# Altium PCB PCB.PcbDoc
Units mil, origin at the board's own origin, x right, y up, seen from the top; angles counter-clockwise.
Board outline 2420.03 x 3310.03 mil, 2 copper layers (Top Layer, Bottom Layer); 31 components, 31 nets, 145 pads, 2 vias.
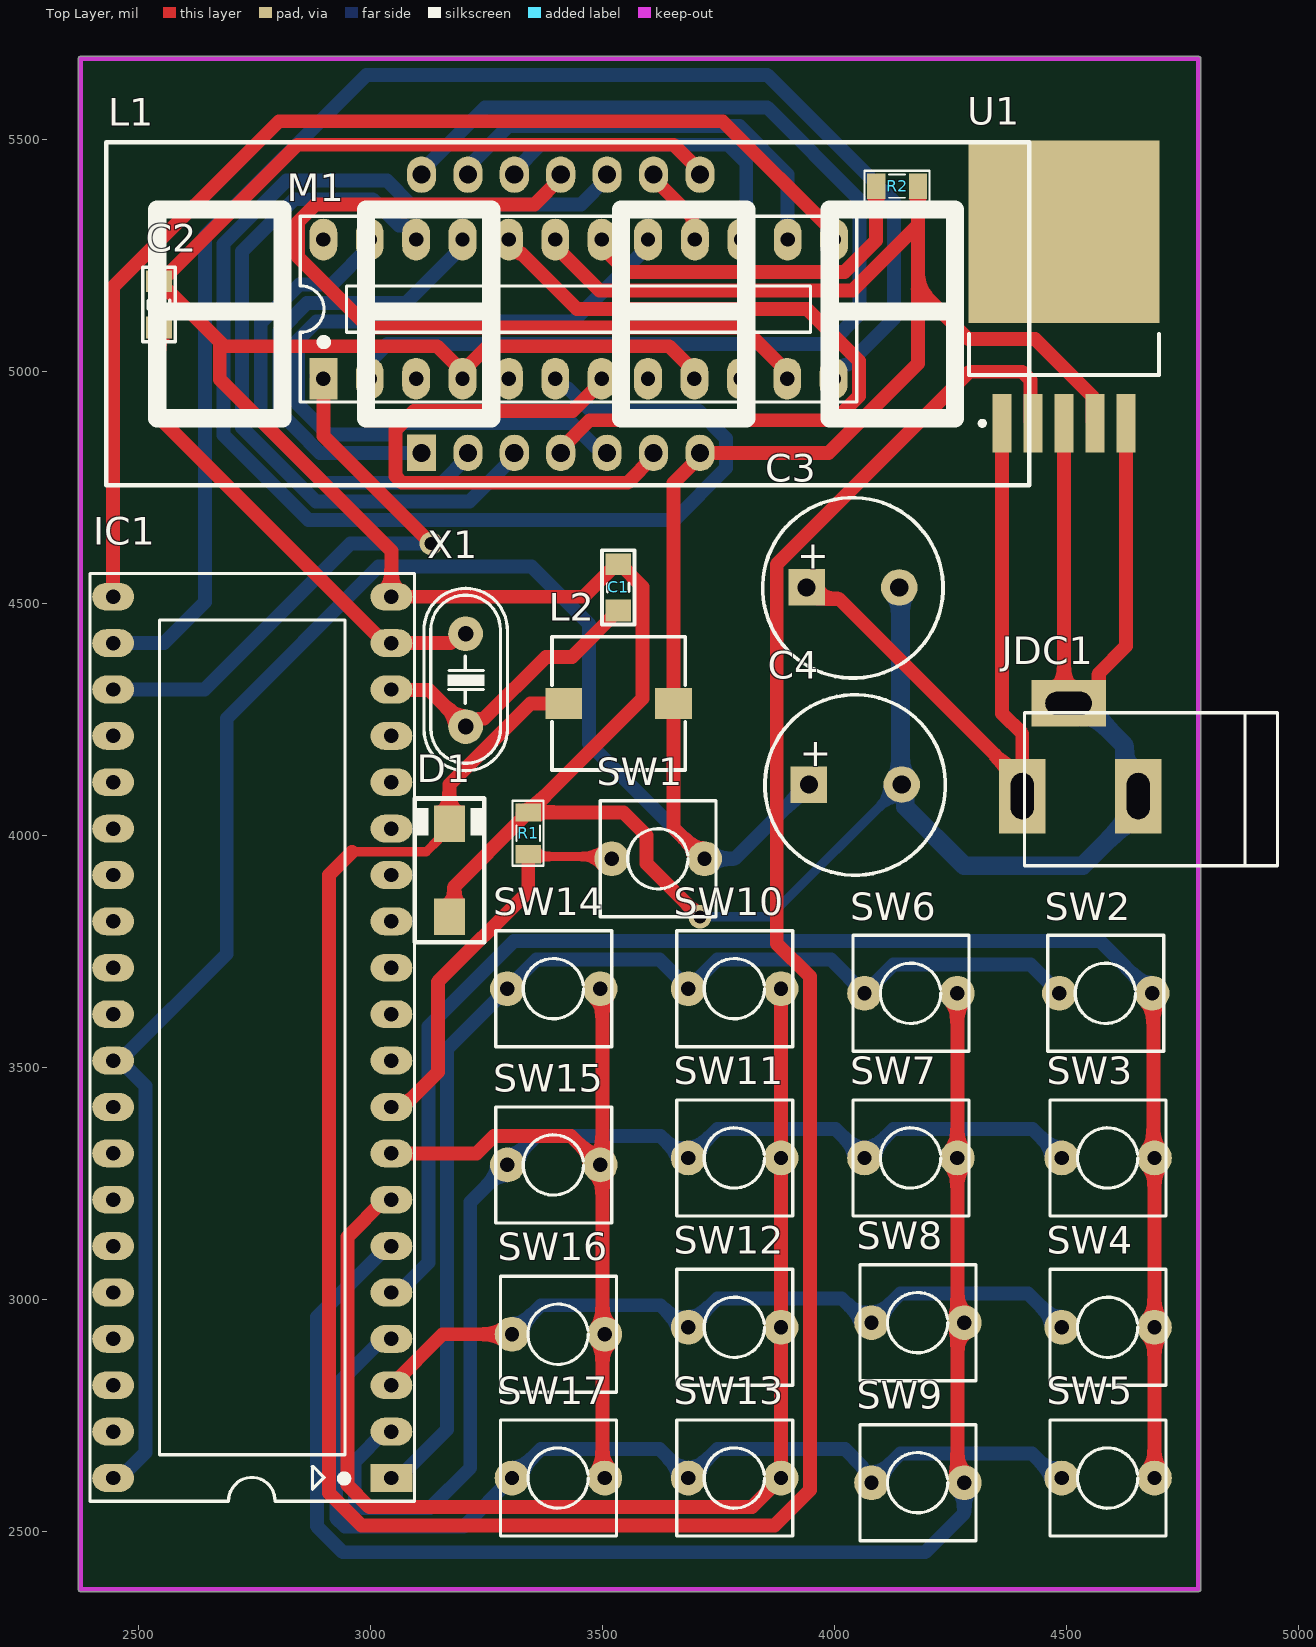
[diagram p0: Top Layer view]
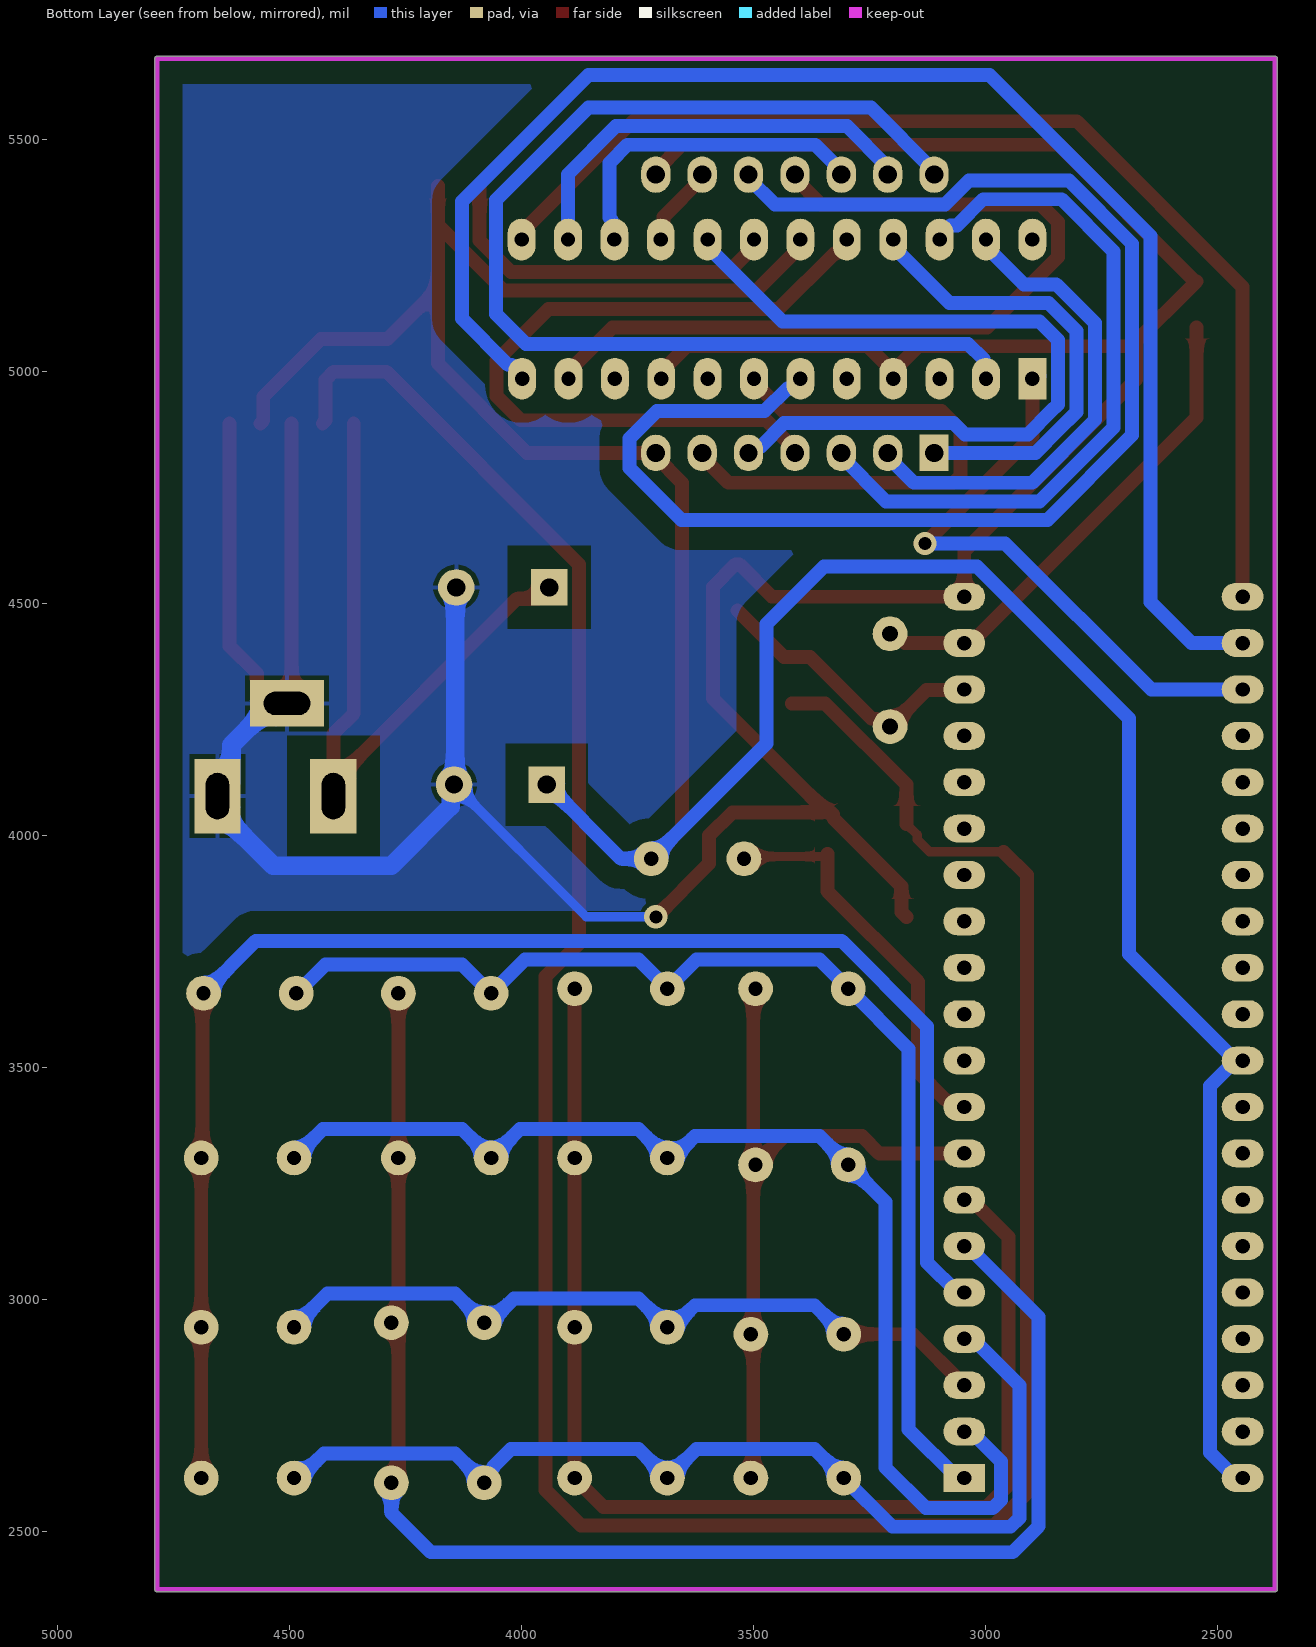
[diagram p1: Bottom Layer view, seen from below]

## Layer stack, top to bottom
Top Solder: solder mask 0.4, Solder Resist, Dk 3.5
Top Layer: signal copper 1.4
Dielectric 1: dielectric 12.6, FR-4, Dk 4.8
Bottom Layer: signal copper 1.4
Bottom Solder: solder mask 0.4, Solder Resist, Dk 3.5

## Board outline
2375,2369.99 cw(c2375,2375) 2369.99,2375 2369.99,5675 cw(c2375,5675) 2375,5680.02 4785,5680.02 cw(c4785,5675) 4790.02,5675 4790.02,2375 cw(c4785,2375) 4785,2369.99

## Design rules (kind name [scope] priority, off if disabled: settings)
Clearance [All] p1: gap=50 ignorepadtopadclearanceinfootprint=FALSE
PolygonConnect [All] p1: connectstyle=Relief reliefconductorwidth=10 reliefentries=4 polygonreliefangle="90 Angle" airgapwidth=10
RoutingVias [All] p1: holewidth=28 width=50 viastyle="Through Hole" minholewidth=28 minwidth=50 maxholewidth=28 maxwidth=50
SolderMaskExpansion [All] p1: expansion=4 istentingtop=FALSE
Width [All] p1: maxlimit=40 minlimit=20 preferedwidth=30
30 further rules are at their usual default settings.

## Classes and differential pairs
component class 3: C3 C4 D1 JDC1 L2 U1
component class 2: L1 M1 R2
component class 1: C1 C2 IC1 R1 SW1 X1
component class 0: SW2 SW3 SW4 SW5 SW6 SW7 SW8 SW9 SW10 SW11 SW12 SW13 SW14 SW15 SW16 SW17

## Components (designator, comment, footprint, x,y, rotation, side; value= is the part's Value field where it differs from the comment)
C1 "22pF" CAP_0805 3535,4535 r270 top value=33p
C2 "22pF" CAP_0805 2545,5145 r270 top value=33p
C3 "470uF" C10mm 4040,4535 r0 top
C4 "220uF" C10mm 4045,4110 r0 top
D1 "1N5822" SMA 3170,3925 r90 top value="Diode c?m 1N5408"
IC1 "AT89C52" DIP40/W0.6 3045,2615 r90 top
JDC1 "Jac DC" DC-IN 4530,4185 r180 top
L1 "Led 7 Seg 4 digit - Anode" LED7SEG-4-0.56-RG 3430,5120 r0 top
L2 "150mH" L-SMD-M-7.3x4.5 3535,4285 r90 top value="150 mH"
M1 "MAX7219ENG" DIP24/W0.3 2898.25,4985 r0 top
R1 "100k" RES-SMD-0805 3340,4005 r270 top
R2 "10k" RES-SMD-0805 4135,5400 r0 top
SW1 "SW" SW2 3520,3950 r0 top value="SW chip 2 pin"
SW2 "SW" SW2 4485,3660 r0 top value="SW chip 2 pin"
SW3 "SW" SW2 4490,3305 r0 top value="SW chip 2 pin"
SW4 "SW" SW2 4490,2940 r0 top value="SW chip 2 pin"
SW5 "SW" SW2 4490,2615 r0 top value="SW chip 2 pin"
SW6 "SW" SW2 4065,3660 r0 top value="SW chip 2 pin"
SW7 "SW" SW2 4065,3305 r0 top value="SW chip 2 pin"
SW8 "SW" SW2 4080,2950 r0 top value="SW chip 2 pin"
SW9 "SW" SW2 4080,2605 r0 top value="SW chip 2 pin"
SW10 "SW" SW2 3685,3670 r0 top value="SW chip 2 pin"
SW11 "SW" SW2 3685,3305 r0 top value="SW chip 2 pin"
SW12 "SW" SW2 3685,2940 r0 top value="SW chip 2 pin"
SW13 "SW" SW2 3685,2615 r0 top value="SW chip 2 pin"
SW14 "SW" SW2 3295,3670 r0 top value="SW chip 2 pin"
SW15 "SW" SW2 3295,3290 r0 top value="SW chip 2 pin"
SW16 "SW" SW2 3305,2925 r0 top value="SW chip 2 pin"
SW17 "SW" SW2 3305,2615 r0 top value="SW chip 2 pin"
U1 "LM2976" TO-263 4495,5125 r90 top
X1 "12MHz" XT2 3205,4335 r270 top value=4Mhz

## Footprints (in the part's own frame and the unit in brackets; to place one, negate y for a bottom-side part, rotate by r counter-clockwise, add the part's x,y. Pads: shape width x height; smd on the part's side, far side on the other; paste and mask are expansions set on the pad)
C10mm [mm]
  rect 2x2 hole 1: 1(-2.54,0)
  round 2 hole 1: 2(2.54,0)
  silkscreen extent -4.95,-4.96 4.93,4.92, body extent -5,-5 4.97,5, height 20.01
CAP_0805 [mm]
  rect 1.2x1.4 smd: 1(-1.27,-0.025) 2(1.27,-0.025)
  silkscreen extent -2.03,-0.91 2.03,0.86, body extent -1.01,-0.66 1.01,0.61, height 0.61
DC-IN [mil] "Jac DC input"
  rect 100x160 hole 50 slot 100 at 90 deg: 1(125,100) 2(-125,100)
  rect 160x100 hole 50 slot 100 at 0 deg: 3(25,-100)
  silkscreen extent -425,-80 120,250, body extent -410,-105 134,269, height 434
DIP24/W0.3 [mil] "DIP24/W.300, Pin to pin 100mil"
  rect 60x90 hole 31: 1(0,0)
  oval 60x90 hole 31: 2(100,0) 3(200,0) 4(300,0) 5(400,0) 6(500,0) 7(600,0) 8(700,0) 9(800,0) 10(900,0) 11(1000,0) 12(1100,0) 13(1101,300) 14(1001,300) 15(901,300) 16(801,300) 17(700,300) 18(600,300) 19(500,300) 20(400,300) 21(300,300) 22(200,300) 23(100,300) 24(0,300)
  silkscreen extent -50,-50 1150,350, body extent -89,-3 1181,307, height 200
DIP40/W0.6 [mil] "40 PIN, W 600mil, Pin to pin 100mil"
  rect 60x90 hole 31: 1(0,0)
  oval 60x90 hole 31: 2(100,0) 3(200,0) 4(300,0) 5(400,0) 6(500,0) 7(600,0) 8(700,0) 9(800,0) 10(900,0) 11(1000,0) 12(1100,0) 13(1200,0) 14(1300,0) 15(1400,0) 16(1500,0) 17(1600,0) 18(1700,0) 19(1800,0) 20(1900,0) 21(1900,600) 22(1800,600) 23(1700,600) 24(1600,600) 25(1500,600) 26(1400,600) 27(1300,600) 28(1200,600) 29(1100,600) 30(1000,600) 31(900,600) 32(800,600) 33(700,600) 34(600,600) 35(500,600) 36(400,600) 37(300,600) 38(200,600) 39(100,600) 40(0,600)
  silkscreen extent -50,-50 1950,650, body extent -82,-10 1982,600, height 224
L-SMD-M-7.3x4.5 [mm] "WE-PDA SMD Shielded Power Inductor, 7345"
  rect 1.7x2 smd: 1(0,3) 2(0,-3)
  silkscreen extent -3.65,-3.65 3.65,3.65, body extent -3.65,-3.65 3.65,3.65, height 4.05
LED7SEG-4-0.56-RG [mil]
  round 60 on Top Overlay: 0(-535,-205) 0(-85,-205) 0(465,-205) 0(915,-205)
  round 118.11 on Top Overlay: 0(-20,-95) 0(-20,155)
  rect 62.99x78.74 hole 39.37: 1(-320,-295)
  oval 62.99x78.74 hole 39.37: 2(-220,-295) 3(-120,-295) 4(-20,-295) 5(80,-295) 6(180,-295) 7(280,-295) 8(280,305) 9(180,305) 10(80,305) 11(-20,305) 12(-120,305) 13(-220,305) 14(-320,305)
  silkscreen extent -1000,-365 990,375, body extent -995,-370 985,378, height 565
RES-SMD-0805 [mil]
  rect 39.37x55 smd: 1(-45,0) 2(45,0)
  silkscreen extent -70,-34 70,33, body extent -39,-25 39,25, height 31
SMA [mm]
  rect 2x1.7 smd: 1(-2.544,0) 2(2.544,0)
  silkscreen extent -3.94,-1.9 3.94,1.91, body extent -2.87,-1.4 2.87,1.4, height 2.29
SW2 [mil] "SW button 2pin, 250x 250 mil"
  round 75 hole 31: 1(0,0) 2(200,0)
  silkscreen extent -25,-125 225,125
TO-263 [mm]
  rect 3.2x1.05 smd: 1(-6,3.4) 2(-6,1.7) 3(-6,0) 4(-6,-1.7) 5(-6,-3.4)
  rect 10x10.45 smd: 6(4.5,0)
  silkscreen extent -6.12,-5.2 -1.1,5.2, body extent -6.58,-5.2 7.57,5.2, height 4.65
XT2 [mil] "Footpin for Crystal 2 pin"
  round 75 hole 34: 1(-100,0) 2(100,0)
  silkscreen extent -198,-90 195,90, body extent -233,-93 213,90, height 138

## Part data
C1 C2: library part CapSMD, "Capacitor", LatestRevisionDate=17-Jul-2002, LatestRevisionNote="Re-released for DXP Platform.", PackageReference=RAD-0.3, Published=8-Jun-2000, Publisher="Altium Limited"
C3 C4: library part "Cap Pol", "Polarized Capacitor (Axial)", LatestRevisionDate=17-Jul-2002, LatestRevisionNote="Re-released for DXP Platform.", PackageReference=POLAR0.8, Published=8-Jun-2000, Publisher="Altium Limited"
D1: "Schottky Rectifiers"
IC1: "Atmel AT89C52, 8k Byte Flash Memory , 40 Pin"
JDC1: library part DCIN, "Jac DC input"
L1: library part LED7SEG-4-RG
L2: library part Inductor, "Inductor"
M1: "Serially Interfaced, 8-Digit LED Display Driver", Code_JEDEC=MS-001-AF, ComponentLink1Description="Manufacturer Link", ComponentLink1URL=http://www.maxim-ic.com/, ComponentLink2Description=Datasheet, ComponentLink2URL=http://pdfserv.maxim-ic.com/en/ds/MAX7219-MAX7221.pdf, DatasheetVersion=Jul-1997, LatestRevisionDate=29-May-2009, LatestRevisionNote="Component Body Added.", PackageDescription="DIP, 24-Pin, Row Spacing 7.62 mm, Pitch 2.54 mm", PackageReference=NG24A, PackageVersion=1997, Published=16-Jan-2001, Publisher="Altium Limited"
R1 R2: library part "Resistor - SMD", "Resistor", Manufacturer="Generic Components", Class=Passive, Published=08/06/2000, Publisher="Altium Hobart Technology Centre"
SW1 SW2 SW3 SW4 SW5 SW6 SW7 SW8 SW9 SW10 SW11 SW12 SW13 SW14 SW15 SW16 SW17: library part SW2, "Switch button 2 pin"
U1: library part LM2596, Max Input Voltage="12 V", Max Output Current="3 (6.0 peak) A", Max Output Voltage=mV, Temperature Range="-40 to +125 degC", Category=IC-Power, Min Input Voltage=mV, Min Output Voltage=mV, Mounting Technology="Surface Mount", Status=Unreleased, Supply Voltage=mV
X1: library part XT2, "Crystal For all Crystal 2pin."

## Via types
v1: diameter 50, hole 28, Top Layer to Bottom Layer, 2 vias

## Nets (pads, with @x,y where several pads share a name; then routed paths per layer and width w, separated by ;. In a path a pad name is that pad's centre, name@x,y a point inside that pad or via, vN(x,y) a via of type N, cw(c..) or ccw(c..) an arc to the next point about the centre after c; other vN are vias at no path point)
5V: C4.1 IC1.31 IC1.40 L1.7 L2.2 M1.19 R2.2 SW1.2 U1.4 | length 6963.2
  Top Layer w30: M1.19 3398.25,5270 3493.25,5175 4038.6,5175 4180,5316.4 ; SW1.2 3653.11,4016.89 3653.11,4275 3653.11,4760.24 3710,4817.13 L1.7 3987.6,4825 4180,5017.4 4180,5179.25 ; R2.2 4180,5316.4 ; U1.4 4556.26,4894.45 4556.26,4946.54 4432.11,5070.69 4288.56,5070.69 4180,5179.25 ; 4180,5179.25 4180,5316.4
  Bottom Layer w30: IC1.40 2460,2615 2515,2670 2515,3460 IC1.31@2460,3515 ; IC1.31 IC1.31@2460,3515 ; C4.1 3785,3950 SW1.2 3471.14,4198.86 3471.14,4456.36 3347.5,4580 3017.22,4580 2690,4252.78 2690,3745 IC1.31@2460,3515
D0: L1.14 M1.2 | length 2472.3
  Bottom Layer w30: M1.2 3003.99,4990.74 3003.99,5027.23 3036.75,5060 3990,5060 4054.25,5124.25 4054.25,5370.38 3855.25,5569.37 3246.5,5569.37 3110,5432.87 L1.14
D1: L1.11 M1.11 | length 1861.7
  Top Layer w30: L1.11 3410,5417.13 3353.5,5360.63 2881.09,5360.63 2843.25,5322.78 2843.25,5247.22 2995.47,5095 3803.25,5095 3898.25,5000 M1.11
D2: L1.10 M1.6 | length 3043
  Bottom Layer w30: M1.6 3398.25,4978.12 3412.1,4964.26 3426.21,4964.26 3475.47,4915 3621.03,4915 3707.77,4915 3766.5,4856.28 3766.5,4792.13 3655,4680.63 2865.99,4680.63 2683.25,4863.37 2683.25,5275.92 2819.26,5411.93 3035.3,5411.93 3086.6,5360.63 3453.5,5360.63 3510,5417.13 L1.10
D3: L1.6 M1.7 | length 1188
  Top Layer w30: M1.7 3498.25,4977.69 3435.56,4915 3093.78,4915 3053.5,4874.73 3053.5,4775.27 3068.15,4760.63 3553.5,4760.63 3610,4817.13 L1.6
GND: C1.1 C2.1 C3.2 C4.2 D1.1 IC1.20 JDC1.2 JDC1.3 L1.8 M1.4 M1.9 R1.1 U1.3 U1.5 | length 8503.2
  Top Layer w30: 2675,5064 2675,4983.4 3045,4613.4 IC1.20 3460.06,4515 3530.06,4585 C1.1 3537.94,4585 3586.56,4536.38 3586.56,4295.79 R1.1@3352.5,4061.73 ; D1.1 3180.66,3835.5 3180.66,3890.66 3327.5,4037.5 3327.5,4045.32 3332.19,4050 R1.1 ; M1.4 M1.4@3198.25,5000 ; R1.1@3352.5,4050 3545,4050 3595,4000 3595,3939.84 v1(3710,3824.84) ; M1.9 3698.25,5000 3643.25,5055 3253.25,5055 M1.4@3198.25,5000 ; L1.8 3710,5432.87 3653.5,5489.37 2842.31,5489.37 2547.94,5195 C2.1 2684,5055 3143.25,5055 M1.4@3198.25,5000 ; U1.3 4495,4295 JDC1.3 4535,4285 4570,4320 4570,4350 4628.86,4408.86 U1.5
  Bottom Layer w20: v1(3710,3824.84) 3859.84,3824.84 C4.2
  Bottom Layer w30: L1.8 L1.8@3710.17,5425
  Bottom Layer w40: C3.2 4142.5,4532.5 C4.2@4142.5,4112.5 ; C4.2 4152.41,4102.59 4152.41,4062.59 4280,3935 4535,3935 4655,4055 JDC1.2 4625,4115 4625,4195 4535,4285 JDC1.3
NetC1_2: C1.2 IC1.18 X1.2 | length 617.2
  Top Layer w30: IC1.18@3053.03,4313.86 3126.14,4313.86 X1.2 3217.18,4235 3234.11,4251.93 3244.74,4251.93 3377.81,4385 3434,4385 C1.2
NetC2_2: C2.2 IC1.19 X1.1 | length 1064.6
  Top Layer w30: C2.2 2544,4901 3030,4415 IC1.19 3172.82,4415 3192.82,4435 X1.1
NetC3_1: C3.1 JDC1.1 U1.1 | length 1460.9
  Top Layer w30: C3.1 3964.37,4510.63 4009.37,4510.63 JDC1.1@4405,4115 ; U1.1 4361.14,4263.5 4405,4219.64 JDC1.1@4405,4115 ; JDC1.1 JDC1.1@4405,4115
NetD1_2: D1.2 L2.1 U1.2 | length 5993.5
  Top Layer w20: 2960,3965 3119.82,3965 3146.54,3991.72 3146.54,4001.69 D1.2
  Top Layer w30: 2960,3965 2910,3915 2910,2583.08 2980.58,2512.5 3870.89,2512.5 3947.5,2589.11 3947.5,3695.89 3875.63,3767.76 3875.63,4584.73 4290.9,5000 4404.83,5000 4422.4,4982.43 4422.4,4894.45 U1.2 ; D1.2 3170,4110 3345,4285 L2.1
NetIC1_1: IC1.1 SW2.1 SW6.1 SW10.1 SW14.1 | length 2516.8
  Bottom Layer w30: IC1.1 3060,2615 3165,2720 3165,3540 SW14.1 3357.5,3732.5 3622.5,3732.5 SW10.1 3747.5,3732.5 3992.5,3732.5 SW6.1 4127.5,3722.5 4422.5,3722.5 SW2.1
NetIC1_2: IC1.2 SW3.1 SW7.1 SW11.1 SW15.1 | length 2511.4
  Bottom Layer w30: IC1.2 3030,2715 2966.01,2651.01 2966.01,2567.57 2983.58,2550 3127.82,2550 3215,2637.18 3215,3210 SW15.1 3357.5,3352.5 3625.32,3352.5 3672.82,3305 SW11.1 3747.5,3367.5 4002.5,3367.5 SW7.1 4127.5,3367.5 4427.5,3367.5 SW3.1
NetIC1_3: IC1.3 SW4.1 SW8.1 SW12.1 SW16.1 | length 1639.7
  Top Layer w30: IC1.3 3155,2925 SW16.1
  Bottom Layer w30: SW16.1 3367.5,2987.5 3625.32,2987.5 3672.82,2940 SW12.1 3747.5,3002.5 4015.83,3002.5 4068.33,2950 SW8.1 4142.5,3012.5 4417.5,3012.5 SW4.1
NetIC1_4: IC1.4 SW5.1 SW9.1 SW13.1 SW17.1 | length 2225.9
  Bottom Layer w30: IC1.4 3026.01,2915 2926.01,2815 2926.01,2528.99 2945,2510 3200,2510 SW17.1 3367.5,2677.5 3622.5,2677.5 SW13.1 3747.5,2677.5 4022.5,2677.5 4060,2640 4060,2637.18 4080,2617.18 SW9.1 4142.5,2667.5 4425.83,2667.5 4478.33,2615 SW5.1
NetIC1_5: IC1.5 SW2.2 SW3.2 SW4.2 SW5.2 | length 3345.2
  Top Layer w30: SW2.2 4687.5,3657.5 4687.5,3307.5 SW3.2 SW4.2 SW5.2
  Bottom Layer w30: IC1.5 3060,3015 3125,3080 3125,3588.39 3309.11,3772.5 4572.5,3772.5 SW2.2
NetIC1_6: IC1.6 SW6.2 SW7.2 SW8.2 SW9.2 | length 3253.9
  Top Layer w30: SW6.2 SW7.2 4265,2632.18 4280,2617.18 SW9.2
  Bottom Layer w30: IC1.6 3038.12,3115 2885,2961.88 2885,2511.01 2941.01,2455 4195,2455 4280,2540 SW9.2
NetIC1_7: IC1.7 SW10.2 SW11.2 SW12.2 SW13.2 | length 2698.9
  Top Layer w30: IC1.7 3030,3215 2950,3135 2950,2599.64 2997.14,2552.5 3822.5,2552.5 SW13.2 SW12.2 SW11.2 SW10.2
NetIC1_8: IC1.8 SW14.2 SW15.2 SW16.2 SW17.2 | length 1550.6
  Top Layer w30: IC1.8 3228.34,3315 3265.84,3352.5 3432.5,3352.5 SW15.2 ; SW14.2 3500,3665 3500,2620 SW17.2
NetIC1_9: IC1.9 R1.2 SW1.1 | length 866
  Top Layer w20: R1.2 3345,3955 3515,3955 SW1.1
  Top Layer w30: IC1.9 3068.12,3415 3083.12,3430 3085,3430 3145,3490 3145,3685 3340,3880 R1.2
NetIC1_21: IC1.21 M1.13 | length 2484.3
  Top Layer w30: IC1.21 2445,5182.54 2802.46,5540 3759.25,5540 3999.25,5300 M1.13
NetIC1_22: IC1.22 M1.12 | length 3205.9
  Bottom Layer w30: IC1.22 2555,4415 2643.25,4503.25 2643.25,5292.49 2990.76,5640 3855.25,5640 4128.25,5367.01 4128.25,5115 4028.25,5015 4021.36,5015 3998.25,4991.88 M1.12
NetIC1_23: IC1.23 M1.1 | length 1293.9
  Top Layer w30: M1.1 2898.25,4861.75 v1(3130,4630) v1@3140,4630
  Bottom Layer w30: IC1.23 2641.72,4315 2956.72,4630 v1(3130,4630) ; M1.1@2883.25,4990.74 2888.99,4985 M1.1
NetL1_1: L1.1 M1.21 | length 1003.7
  Bottom Layer w30: L1.1 2891.32,4825 2841.32,4875 2803.25,4913.08 2803.25,5088.25 2863.25,5148.25 3076.49,5148.25 3198.25,5270 M1.21
NetL1_2: L1.2 M1.23 | length 1061
  Bottom Layer w30: M1.23 2998.25,5270 2916.49,5188.25 2846.68,5188.25 2763.25,5104.82 2763.25,4896.51 2899.12,4760.63 3153.5,4760.63 3210,4817.13 L1.2
NetL1_3: L1.3 M1.22 | length 1541.7
  Bottom Layer w30: M1.22 3098.25,5291.88 3075.13,5315 3061.03,5315 3004.1,5371.93 2835.82,5371.93 2723.25,5259.35 2723.25,4879.94 2882.56,4720.63 3213.5,4720.63 3310,4817.13 L1.3
NetL1_4: L1.4 M1.20 | length 1641.7
  Top Layer w30: M1.20 3298.25,5278.12 3321.36,5255 3325,5255 3445,5135 3941.03,5135 4053.25,5022.78 4053.25,4947.22 4001.46,4895.43 3472.56,4895.43 3410,4832.87 L1.4
NetL1_5: L1.5 M1.17 | length 1721.4
  Bottom Layer w30: L1.5@3508.95,4825 3494.76,4839.19 3483.58,4839.19 3433.4,4889.37 3068.15,4889.37 3043.78,4865 2907.89,4865 2857.89,4915 2843.25,4929.64 2843.25,5068.25 2883.25,5108.25 3436.49,5108.25 3598.25,5270 M1.17
NetL1_9: L1.9 M1.16 | length 177
  Top Layer w30: L1.9 3610,5417.13 3693.51,5333.62 3693.51,5290.74 M1.16
NetL1_12: L1.12 M1.15 | length 717
  Bottom Layer w30: L1.12 3310,5432.87 3366.5,5489.37 3770.63,5489.37 3810,5450 3810,5331.97 3804.99,5326.95 3804.99,5290.74 M1.15
NetL1_13: L1.13 M1.14 | length 926
  Bottom Layer w30: L1.13 3210,5441.8 3297.57,5529.37 3795.63,5529.37 3899.25,5425.75 M1.14
NetM1_18: M1.18 R2.1 | length 774.7
  Top Layer w30: M1.18 3498.25,5270 3553.25,5215 4022.03,5215 4090,5282.97 R2.1
pads on no net: IC1.10 IC1.11 IC1.12 IC1.13 IC1.14 IC1.15 IC1.16 IC1.17 IC1.24 IC1.25 IC1.26 IC1.27 IC1.28 IC1.29 IC1.30 IC1.32 IC1.33 IC1.34 IC1.35 IC1.36 IC1.37 IC1.38 IC1.39 L1.0 M1.3 M1.5 M1.8 M1.10 M1.24 U1.6

## Polygon pours and split planes (outlines as drawn)
GND on Bottom Layer "GND_L02_P000" (solid, remove dead copper, pour order 0): 2375,5675 2375,2375 4785,2375 4785,5675

## Keep-outs
Keep-Out Layer:
  lines w10: 4785,5530 4785,5675 2375,5675 2375,5620 2375,2375 4785,2375 4785,5620

## Text inside footprints (layer, text, board x,y; h text height)
C3: Top Overlay "+" at 3920,4575 h60
C4: Top Overlay "+" at 3925,4150 h60